# EAGLE board xlr (EAGLE 8.2.2)
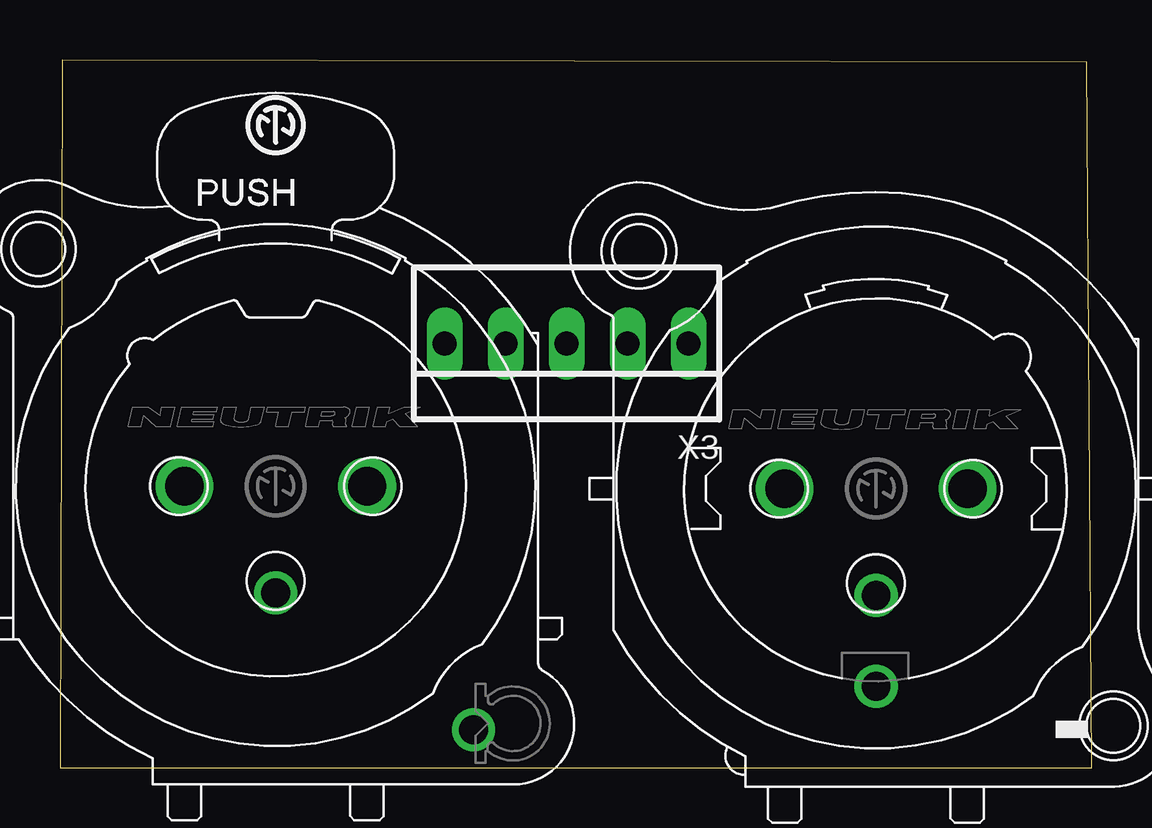
[diagram p0: board, top side]
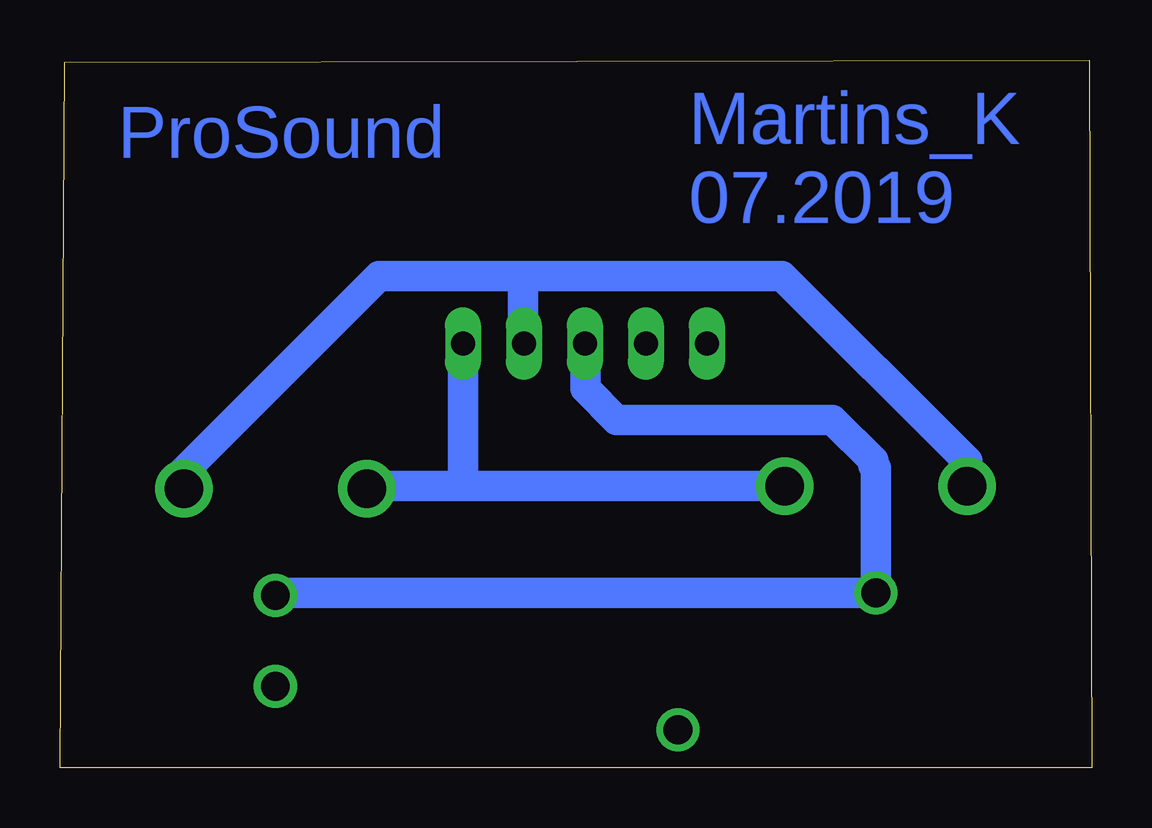
[diagram p1: board, bottom side, seen from below]

Size 43 x 29.5 mm. Coordinates in mm from the lower left corner, seen from the top.
Outline: 0,0 43,0 42.8,29.4 0.1,29.5 0,0
Copper layers (1*16): Top 0.035mm / dielectric 1.5mm / Bottom 0.035mm
Design rules "default": minimum track width 6mil, minimum drill 0.35mm, track to track 6mil, track to pad 6mil, pad to pad 6mil, via to via 6mil, smd to smd 6mil, copper to edge 40mil, drill to drill 6mil, minimum pad ring 10mil, minimum via ring 8mil, stop-mask expansion 4mil, vias tented up to drill 0mil, thermal gap 10mil

## Footprints (pad centres in the part's own frame; a part is rotated, then mirrored left to right if it is on the bottom)
NC3FAV2 = drill 1.6: 1 3.81,0; 2 -3.81,0 | drill 1.2: 3 0,-4.45; G 8.25,-10.16
NC3MAV = drill 1.6: 1 -3.81,0; 2 3.81,0 | drill 1.2: 3 0,-4.45; G 0,-8.25
22-23-2051 = drill 1 long: 1 -5.08,0; 2 -2.54,0; 3 0,0; 4 2.54,0; 5 5.08,0

## Placement (x,y rotation side)
X1  NC3FAV2  [NC3FAV2]  8.99,11.73 0 top
X2  NC3MAV  [NC3MAV]  34.02,11.63 0 top
X3  22-23-2051  [22-23-2051]  21.12,17.68 180 top

## Library data of the parts
X1 = con-neutrik_ag; MF: NEUTRIK; MPN: NC3FAV2; OC_FARNELL: unknown; OC_NEWARK: 83F7211
X2 = con-neutrik_ag; MF: FARNELL; MPN: NC3MAV; OC_FARNELL: 724531; OC_NEWARK: 46WX3058
X3 = con-molex; MF: MOLEX; MPN: 22-23-2051; OC_FARNELL: 1462952; OC_NEWARK: 38C9178

## Nets
N$1: X1.1 X2.1 X3.1
N$3: X1.2 X2.2 X3.2
N$5: X1.3 X2.3 X3.3

## Tracks (layer width: path | path; a pad name or v marks a point on that pad's centre or on a via)
N$1
  Bottom 1.27: 26.31,11.73 X1.1 | 26.31,11.73 30.11,11.73 X2.1 | X3.1 26.2,11.84 26.31,11.73
N$3
  Bottom 1.27: X1.2 5.18,12.78 12.9,20.5 23.6,20.5 | 23.6,20.5 23.7,20.4 23.7,17.72 X3.2 | X2.2 37.83,12.37 29.7,20.5 23.6,20.5
N$5
  Bottom 1.27: X2.3 33.92,7.28 X1.3 8.99,12.49 9.1,12.6 9.1,12.8 10.8,14.5 19.8,14.5 21.1,15.8 21.1,17.66 X3.3

## Text on the board
Bottom: ProSound | Martins_K / 07.2019